# Altium PCB Sensor.PcbDoc (part 2 of 2)
Units mm, origin at the board's own origin, x right, y up, seen from the top; angles counter-clockwise.
Board outline 55 x 40.2 mm, 4 copper layers (Top Layer, Layer 1, Layer 2, Bottom Layer), stack 0.603 mm thick; 83 components, 66 nets, 402 pads, 132 vias.
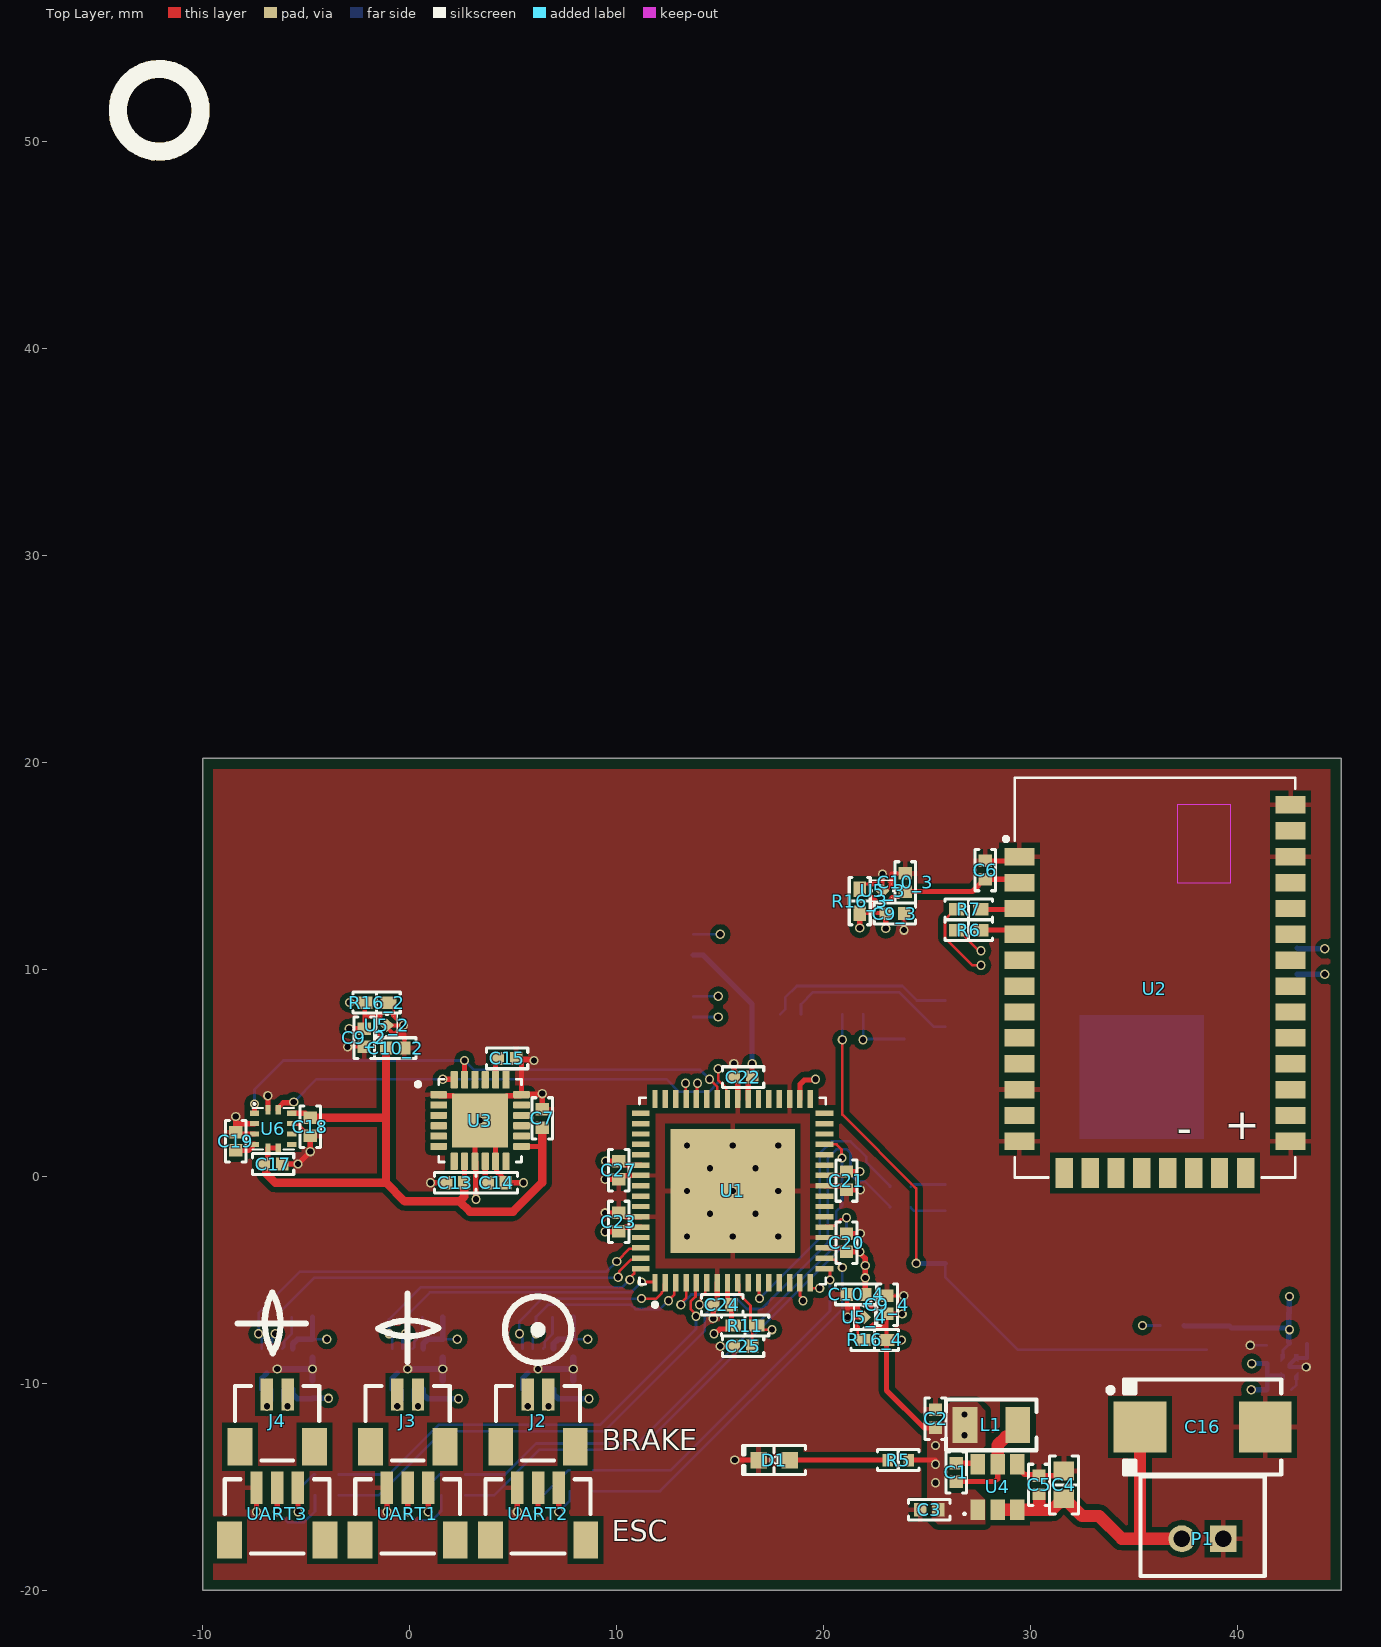
[diagram p0: Top Layer view]

## Via types
v1: diameter 0.45, hole 0.3, Top Layer to Bottom Layer, tented both sides, 132 vias

## Nets (pads, with @x,y where several pads share a name; then routed paths per layer and width w, separated by ;. In a path a pad name is that pad's centre, name@x,y a point inside that pad or via, vN(x,y) a via of type N, cw(c..) or ccw(c..) an arc to the next point about the centre after c; other vN are vias at no path point) (continued)
pads on no net: ICSP1.M J2.M J3.M J4.M J_ESP.M U1.10 U1.12 U1.13 U1.14 U1.22 U1.23 U1.24 U1.27 U1.28 U1.30 U1.31 U1.32 U1.33 U1.36 U1.37 U1.38 U1.43 U1.46 U1.47 U1.48 U1.49 U1.50 U1.51 U1.52 U1.53 U1.56 U1.57 U1.58 U1.61 U2.5 U2.6 U2.8 U2.9 U2.11 U2.13 U2.14 U2.15 U2.16 U2.17 U2.18 U2.19 U2.20 U2.22 U2.23 U2.24 U2.25 U2.26 U2.27 U2.28 U2.29 U2.30 U2.31 U2.33 U3.2 U3.3 U3.4 U3.5 U3.6 U3.7 U3.12 U3.14 U3.15 U3.16 U3.17 U3.19 U3.21 U3.22 U6.7 U6.8 U7.4 U7.5 U7.6 U7.7 U7.8 U7.9 U7.10 U7.11 U7.12 U7.13 U7.14 U7.16 U7.17 U7.18 U7.23 U7.24 U7.26 U7.29 U7.30 U7.31 U7.32 U7.33 U7.36 U7.37 UART1.M UART2.M UART3.M

## Polygon pours and split planes (outlines as drawn)
GND on Top Layer "GND_TOP" (solid, pour order 8): -10,20.2 45,20.2 45,-20 -10,-20
5V on Top Layer "PolygonDirect" (solid, pour order 0): 27.406,-10.912 26.1,-10.912 25,-12.012 25,-16.312 25.5,-16.812 27.9,-16.812 27.9,-15.712 27.3,-15.112 27.3,-13.512 27.7,-13.112 27.8,-13.012 27.8,-11.306
5V on Layer 2 "5V_L03_P007" (solid, pour order 7): -10,-20 -10,20.2 45,20.2 45,-20
VBAT on Layer 2 "NONET_L03_P-001" (solid, pour order 3): -10,-20 -10,-9.8 11.348,-9.753 16.907,-15.3 45,-15.3 45,-20
3V3 on Layer 2 "3V3_L03_P004" (solid, pour order 4): 8.4,1.1 13.5,6.2 18.5,6.2 22.6,2.1 22.6,-5 20.1,-7.5 12.7,-7.5 8.4,-3.2
GND on Layer 1 "GND_L02_P006" (solid, pour order 6): -10,-20 -10,20.2 45,20.2 45,-20
GND on Bottom Layer "GND_TOP" (solid, pour order 5): -10,20.2 45,20.2 45,-20 -10,-20

## Silkscreen, mask and mechanical layers (free items; w line width, h text height)
Top Overlay:
  circle w0.875: c-12.1,51.5 r2
  circle w0.4: c6.2,-7.4 r0.17
  circle w0.3: c6.2,-7.4 r1.6
  lines w0.3: -8.31,-7.1 -5.01,-7.1 ; -0.1,-8.95 -0.1,-5.65 ; -6.639,-5.613 ccw(c-3.96,-7.05) -6.611,-8.538 ccw(c-9.21,-7.1) -6.639,-5.613 ; -1.538,-7.348 cw(c-0.05,-10) 1.387,-7.321 cw(c-0.1,-4.75) -1.538,-7.348
  text "+" at 39.354,1.8 h1.52
  text "-" at 37.054,1.592 h1.52
  text "BRAKE" at 9.27,-13.23 h1
  text "ESC" at 9.77,-17.63 h1
Bottom Overlay:
  circle w0.875: c-16.3,52 r2
  text "PIC32" at 14.63,14.07 h1
  text "ESP32" at 22.23,11.67 h1
Board:
  the board outline again, w0.1